# Altium PCB AC_snubber.pcbdoc
Units mil, origin at the board's own origin, x right, y up, seen from the top; angles counter-clockwise.
Board outline 6230 x 4120 mil, 2 copper layers (Top Layer, Bottom Layer); 23 components, 23 nets, 60 pads, 0 vias.
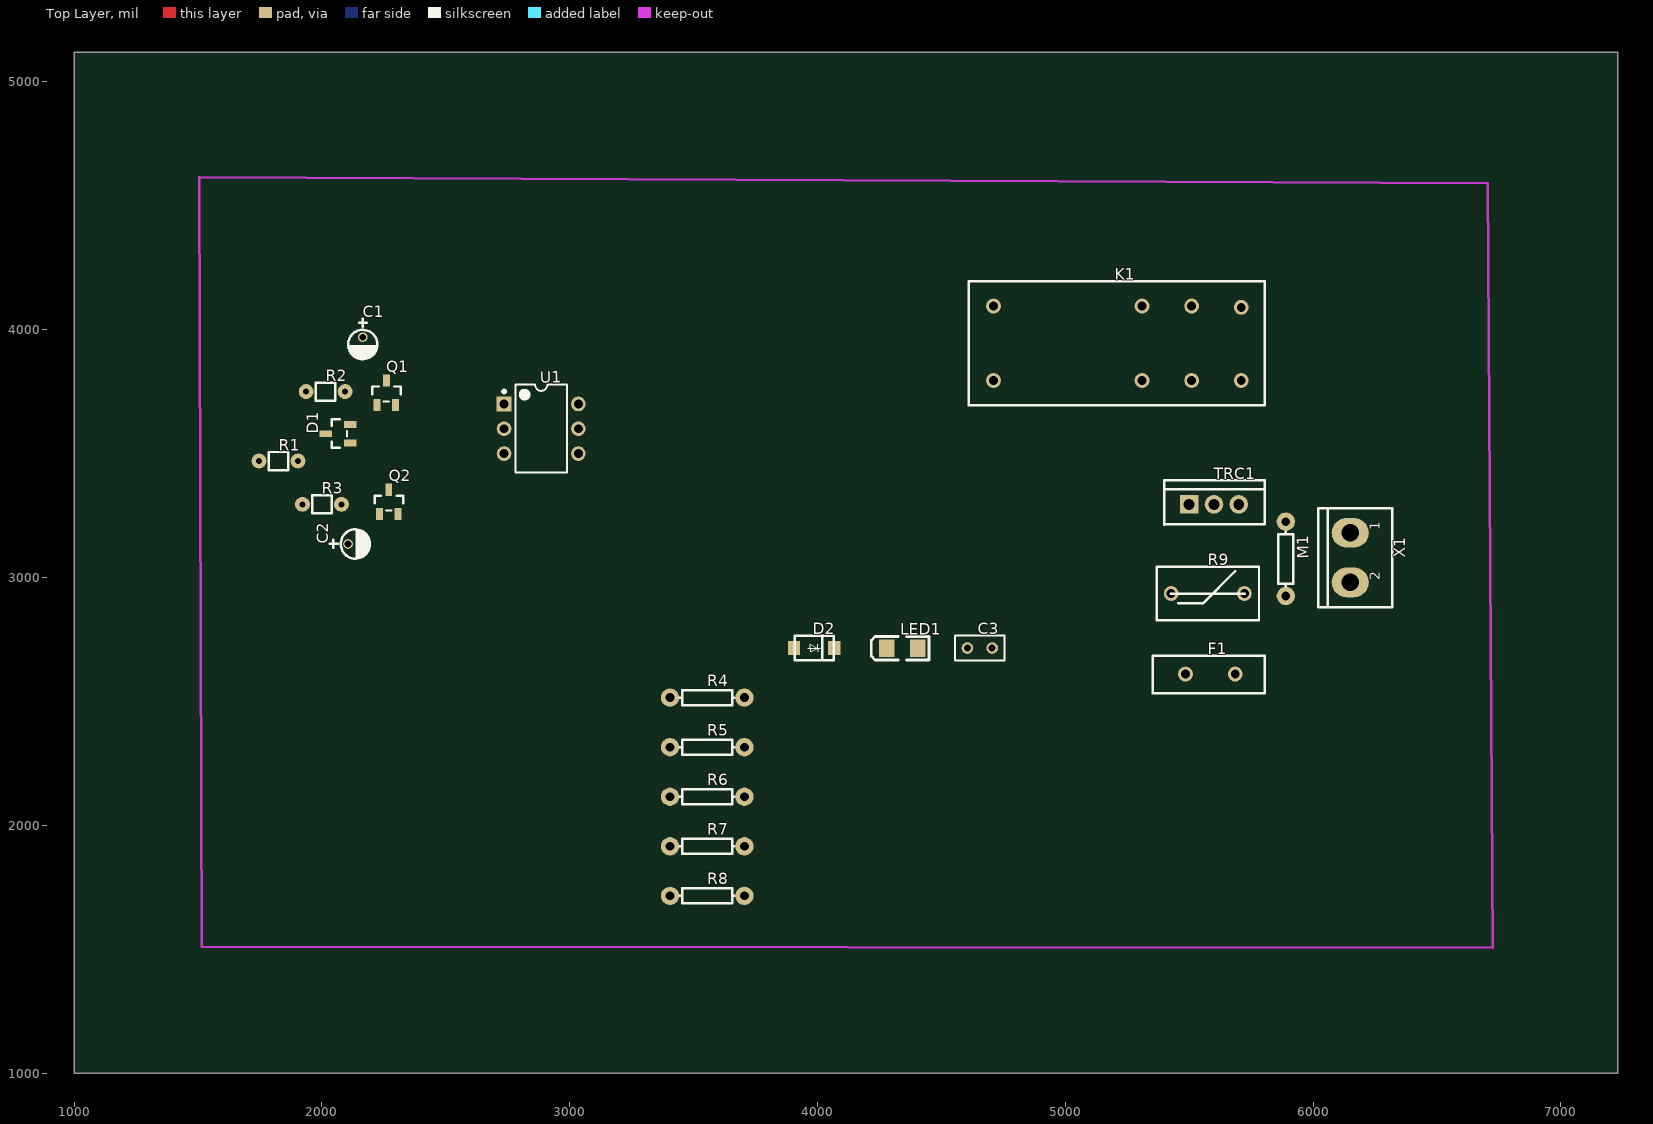
[diagram p0: Top Layer view]
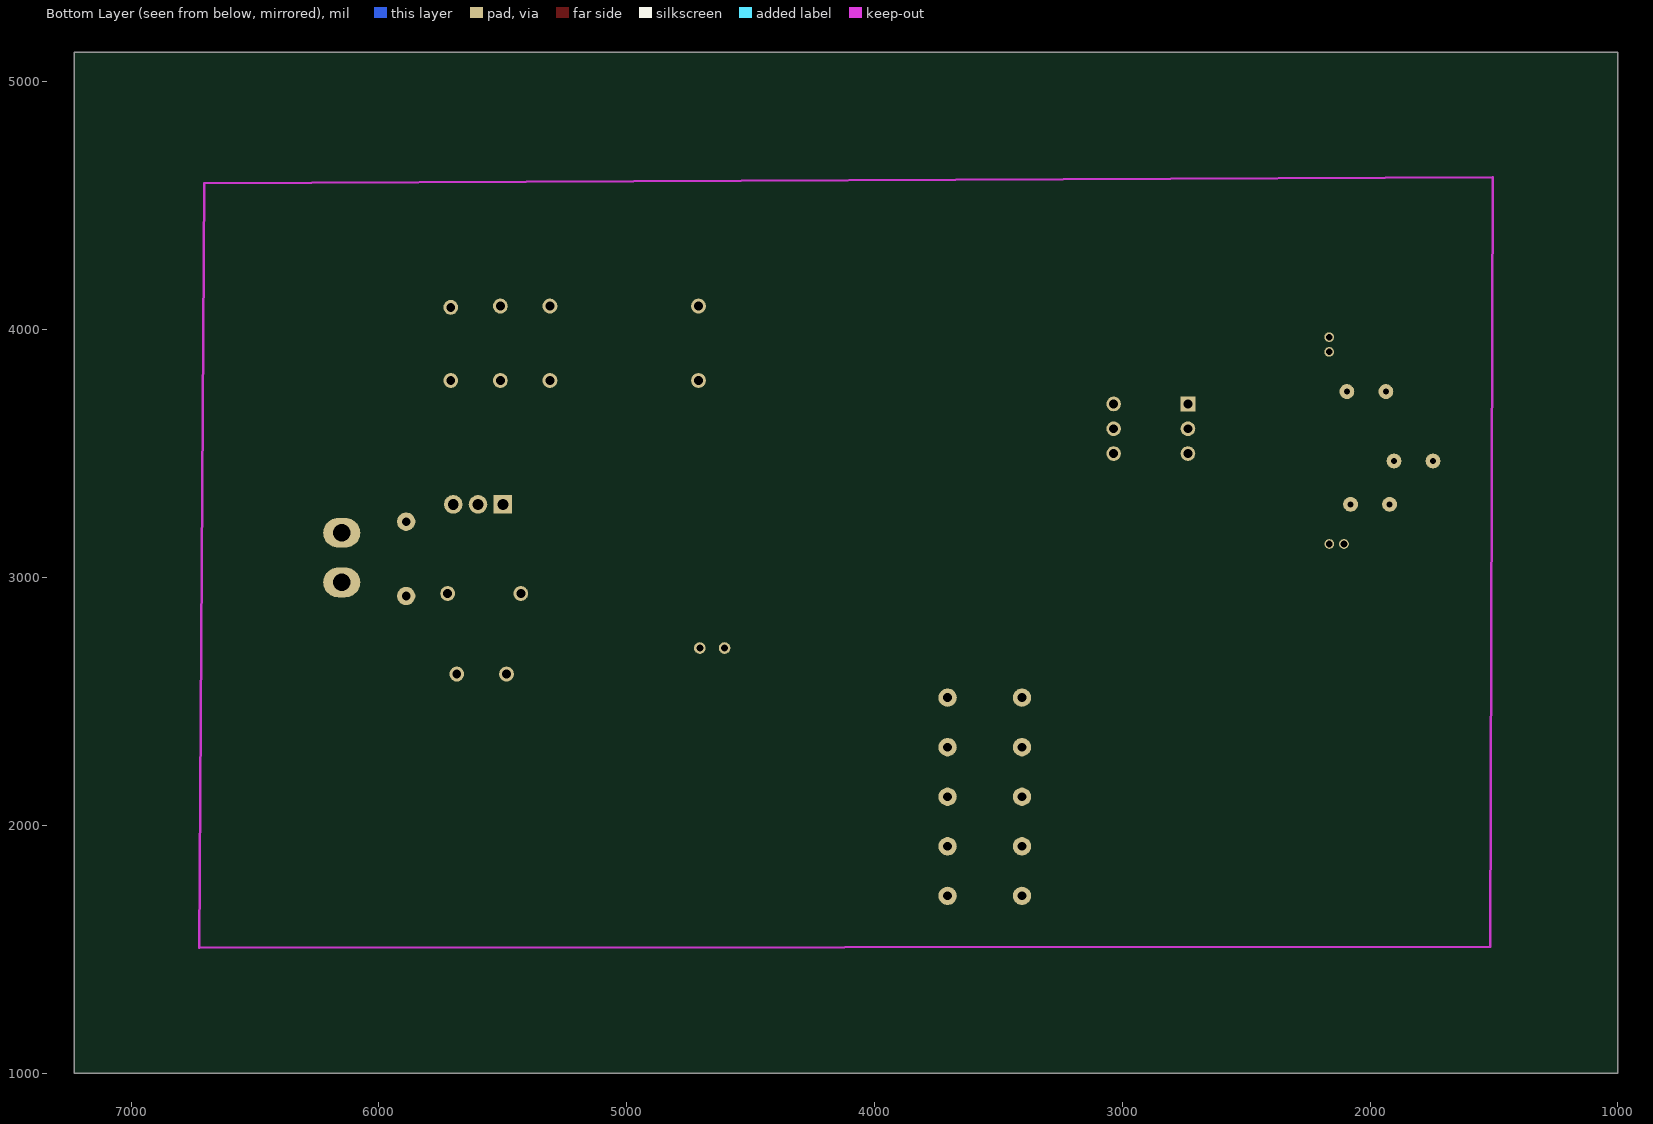
[diagram p1: Bottom Layer view, seen from below]

## Layer stack, top to bottom
Top Layer: signal copper (thickness not stored)
Dielectric: dielectric 12.6, FR-4, Dk 4.8
Bottom Layer: signal copper (thickness not stored)

## Board outline
7230,1000 1000,1000 1000,5120 7230,5120

## Components (designator, comment, footprint, x,y, rotation, side; value= is the part's Value field where it differs from the comment)
C1 "1u" CAP-D3.0XF1.5 2165,3940 r0 top
C2 "1u" CAP-D3.0XF1.5 2135,3135 r90 top
C3 "0.01" RAD-0.1 4655,2715 r0 top
D1 "BAV99" SOT-23(SOT-23-3) 2065,3580 r90 top
D2 "BZG05C9V1" SMA(DO-214AC) 3986,2715 r0 top
F1 "LB400LVF" LB400LVF 5485,2610 r0 top
K1 "RT314005" S0418-CA 5210,3895 r0 top
LED1 "led Green" LED-1206 4342,2714.95 r0 top
M1 "Motor_AC" AXIAL-0.3 5890,3075 r270 top
Q1 "IRLML2402TRPBF" SOT-23(SOT-23-3) 2260,3745 r0 top
Q2 "IRLML2402TRPBF" SOT-23(SOT-23-3) 2270,3305 r0 top
R1 "1k" "1/8W RESISTOR" 1825,3470 r0 top
R2 "100k" "1/8W RESISTOR" 2015,3750 r0 top
R3 "100k" "1/8W RESISTOR" 2000,3295 r0 top
R4 "1k" AXIAL-0.3 3555,2515 r0 top
R5 "1k" AXIAL-0.3 3555,2315 r0 top
R6 "360" AXIAL-0.3 3555,2115 r0 top
R7 "360" AXIAL-0.3 3555,1915 r0 top
R8 "270" AXIAL-0.3 3555,1715 r0 top
R9 "NTC" DIP-10.5*5.5MM 5575,2935 r0 top
TRC1 "BTA204-600D.127" TO-220 5600,3295 r0 top
U1 "MOC3063" DIP-6 2885,3600 r0 top
X1 "KF301-2P" KF301-2P 6150,3180 r270 top

## Footprints (in the part's own frame and the unit in brackets; to place one, negate y for a bottom-side part, rotate by r counter-clockwise, add the part's x,y. Pads: shape width x height; smd on the part's side, far side on the other; paste and mask are expansions set on the pad)
"1/8W RESISTOR" [mil]
  round 60 hole 23.6: 1(-78.7,0) 2(78.7,0)
  silkscreen extent -39,-37 39,36
AXIAL-0.3 [mil]
  round 74 hole 35.4: 1(-150,0) 2(150,0)
  silkscreen extent -110,-30 110,30
CAP-D3.0XF1.5 [mm]
  round 1 hole 0.7: 1(0,0.751) 2(0,-0.751)
  silkscreen extent -1.5,-1.5 1.5,2.65
DIP-6 [mm]
  rect 1.5x1.5 hole 0.9: 1(-3.81,2.54)
  round 1.5 hole 0.9: 2(-3.81,0) 3(-3.81,-2.54) 4(3.81,-2.54) 5(3.81,0) 6(3.81,2.54)
  silkscreen extent -3.95,-4.5 2.65,4.52
DIP-10.5*5.5MM [mil]
  round 60 hole 36: 1(-147.6,0) 2(147.6,0)
  silkscreen extent -207,-108 207,108
KF301-2P [mil]
  oval 120x150 hole 70: 1(0,0) 2(200,0)
  silkscreen extent -100,-130 300,170
LB400LVF [mil]
  round 60 hole 36: 1(0,0) 2(200.79,0)
  silkscreen extent -133,-76 320,74
LED-1206 [mil]
  rect 63x70.9 smd: 1(63,0) 2(-63,0)
  silkscreen extent -125,-48 108,47
RAD-0.1 [mil]
  round 47 hole 28: 1(-50,0) 2(50,0)
  silkscreen extent -100,-50 100,50
S0418-CA [mil]
  round 60 hole 36: 11A(300,-100) 11B(300,200) 12A(100,-100) 12B(100,200) 14A(500,-100) 14B(500,195) A1(-500,200) A2(-500,-100)
  silkscreen extent -600,-200 595,300
SMA(DO-214AC) [mil]
  rect 50x57.9 smd: 1(-81,0) 2(81,0)
  silkscreen extent -78,-49 79,49
SOT-23(SOT-23-3) [mm]
  rect 0.7x1.25 smd: 1(-0.95,-1.25) 2(0.95,-1.25) 3(0,1.25)
  silkscreen extent -1.46,-0.9 1.46,0.65
TO-220 [mil]
  rect 75x75 hole 44: 1(-100,0)
  round 75 hole 44: 2(0,0) 3(100,0)
  silkscreen extent -200,-82 206,96

## Nets (pads, with @x,y where several pads share a name; then routed paths per layer and width w, separated by ;. In a path a pad name is that pad's centre, name@x,y a point inside that pad or via, vN(x,y) a via of type N, cw(c..) or ccw(c..) an arc to the next point about the centre after c; other vN are vias at no path point)
D1_3: D1.3 R1.2 R2.1 R3.1
GND: C1.2 C2.2 Q1.2 Q2.2
K1_11B: K1.11B
K1_12A: K1.12A
K1_12B: K1.12B
K1_14A: K1.14A
Q1_1: C1.1 D1.1 Q1.1 R2.2
Q1_3: D2.1 K1.A1 Q1.3 R5.1
Q2_1: C2.1 D1.2 Q2.1 R3.2
R1_1: R1.1
R4_2: D2.2 K1.A2 LED1.1 R4.2
R5_2: LED1.2 R5.2
R8_2: C3.2 R8.2
R9_1: F1.2 R9.1
TRC1_1: F1.1 K1.11A R6.2 R8.1 TRC1.1
TRC1_2: C3.1 K1.14B M1.2 R7.2 TRC1.2 X1.2
U1_1: R4.1 U1.1
U1_2: Q2.3 U1.2
U1_3: U1.3
U1_4: R7.1 TRC1.3 U1.4
U1_5: U1.5
U1_6: R6.1 U1.6
X1_1: M1.1 R9.2 X1.1

## Silkscreen, mask and mechanical layers (free items; w line width, h text height)
Document:
  lines w0.1: 4114,3059 4116,3061

## Text inside footprints (layer, text, board x,y; h text height)
X1: Top Overlay "1" at 6269.69,3190 h39.37 r90; Top Overlay "2" at 6269.68,2989.66 h39.37 r89